# Altium PCB NIXIEClock_151223.PcbDoc (part 1 of 3)
Units mil, origin at the board's own origin, x right, y up, seen from the top; angles counter-clockwise.
Board outline 8470 x 2600 mil, 2 copper layers (Top Layer, Bottom Layer); 115 components, 157 nets, 483 pads, 249 vias.
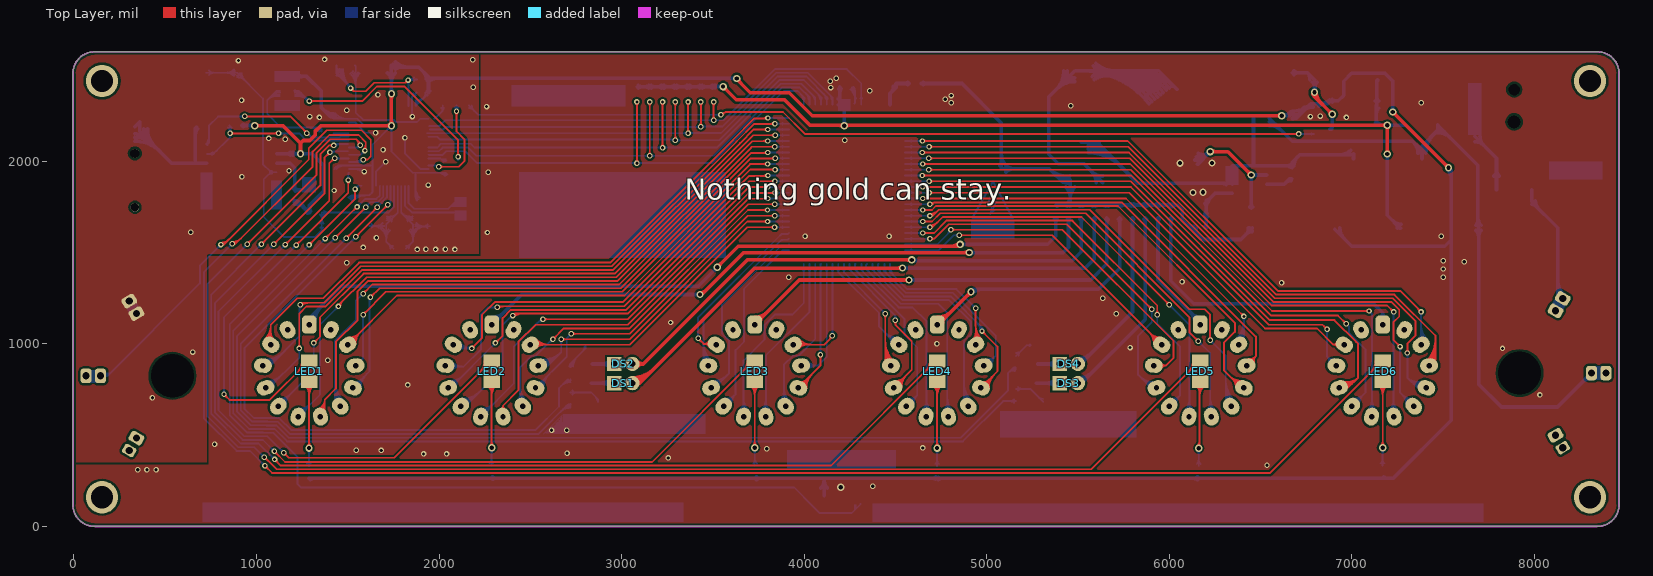
[diagram p0: Top Layer view]
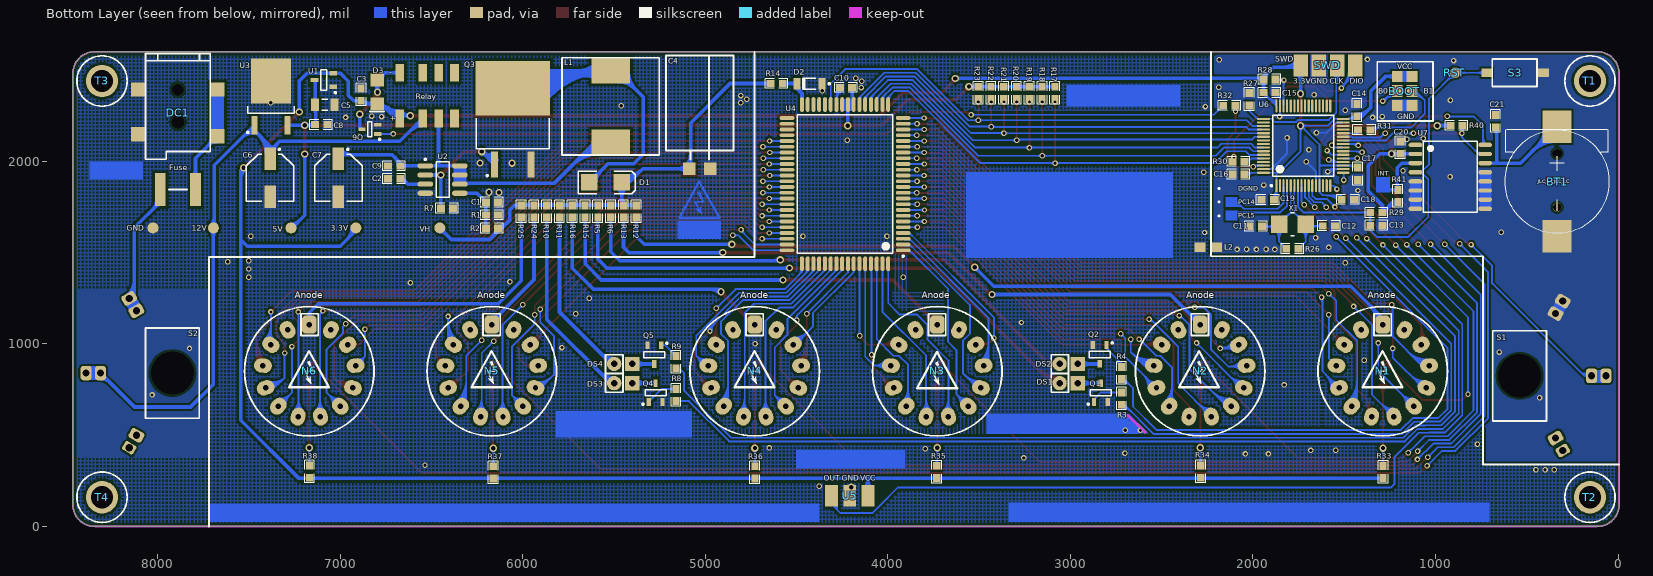
[diagram p1: Bottom Layer view, seen from below]

## Layer stack, top to bottom
Top Layer: signal copper 1.4
Dielectric: dielectric 12.6, FR-4, Dk 4.8
Bottom Layer: signal copper 1.4

## Board outline
8464,120 8464,2480 ccw(c8344,2480) 8344,2600 114,2600 ccw(c114,2480) -6,2480 -6,120 ccw(c114,120) 114,0 8344,0 ccw(c8344,120)

## Design rules (kind name [scope] priority, off if disabled: settings)
Clearance [All] p1: gap=7
HoleSize [All] p1: absolutevalues=TRUE maxlimit=500 minlimit=1 maxpercent=80.000 minpercent=20.000
MinimumSolderMaskSliver [All] p1: minsoldermaskwidth=0
PlaneConnect [All] p1: planeconnectstyle=Direct reliefexpansion=20 reliefentries=4 reliefconductorwidth=15 reliefairgap=10
PolygonConnect [All] p1: connectstyle=Direct reliefconductorwidth=15 reliefentries=4 polygonreliefangle="90 Angle" airgapwidth=10
RoutingVias [All] p1: holewidth=28 width=50 viastyle="Through Hole" minholewidth=10 minwidth=20 maxholewidth=28 maxwidth=50
SilkToSilkClearance [All] p1: silktosilkclearance=0
SilkToSolderMaskClearance [IsPad] p1: minsilkscreentomaskgap=0 clearancetoexposedcopper=TRUE
SolderMaskExpansion [All] p1: expansion=4
Width [All] p1: maxlimit=20 minlimit=1 preferedwidth=10
23 further rules are at their usual default settings.

## Components (designator, comment, footprint, x,y, rotation, side; value= is the part's Value field where it differs from the comment)
3.3V "TEST" TEST#1 6914,1630 r90 bottom (schematic designator 3.3v)
5V "TEST" TEST#2 7269,1630 r180 bottom
12V "TEST" TEST#3 7694,1635 r90 bottom
BOOT "Header 3X2" HDR2X3 1219,2485 r270 bottom
BT1 "CR1220 holder" BAT1220 334,1890 r0 bottom
C1 "Cap Semi" C0603 6168,1777 r180 bottom
C2 "Cap Semi" C0603 6704,1905 r180 bottom
C3 "Cap Semi" C0603 6884,2365 r270 bottom
C4 "Cap Pol1" 电容卧放2.54mm-1 5080,1959 r90 bottom
C5 "Cap Pol1" C1206 7084,2310 r180 bottom
C6 "Cap Pol1" HONOR_63X77 7384,1910 r270 bottom
C7 "Cap Pol1" HONOR_63X77 7009,1910 r270 bottom
C8 "Cap Semi" C0603 7104,2200 r0 bottom
C9 "Cap Semi" C0603 6704,1975 r180 bottom
C10 "Cap" C0603 4229,2405 r180 bottom
C11 "20pF" C0603 1984,1645 r180 bottom
C12 "20pF" C0603 1584,1645 r0 bottom
C13 "Cap Semi" c0603 1324,1650 r180 bottom
C14 "Cap Semi" C0603 1429,2280 r270 bottom
C15 "Cap Semi" C0603 1909,2375 r0 bottom
C16 "Cap Semi" C0603 2079,1930 r180 bottom
C17 "Cap Semi" C0603 1427,1932 r90 bottom
C18 "Cap Semi" C0603 1480,1790 r0 bottom
C19 "Cap Semi" C0603 1919,1790 r180 bottom
C20 "Cap Semi" C0603 1194,2075 r90 bottom
C21 "Cap Semi" C0603 670,2220 r270 bottom
D1 "RS1G" SMB 5546,1884 r180 bottom
D2 "ZM75" LL-34 4429,2425 r0 bottom
D3 "1N4007" 1N4007W 6797,2445 r270 bottom
DC1 "Power" DC-5mm贴片 7889,2590 r270 bottom
DS1 "Lamp Neon" PIN2 2959,785 r0 top
DS2 "Lamp Neon" PIN2 2959,890 r0 top
DS3 "Lamp Neon" PIN2 5399,785 r0 top
DS4 "Lamp Neon" PIN2 5399,890 r0 top
Fuse "Fuse 1" SMD2018P100TF 7889,1845 r0 bottom (schematic designator F1)
GND "TEST" TEST#3 8025,1635 r90 bottom
L1 "Inductor Iron" GDRH127 5518,2301 r90 bottom
L2 "L0" 0805 2200,1529 r0 bottom
LED1 "LED" AVX_B_3528-21 1289,850 r90 top
LED2 "LED" AVX_B_3528-21 2289,850 r90 top
LED3 "LED" AVX_B_3528-21 3729,850 r90 top
LED4 "LED" AVX_B_3528-21 4729,850 r90 top
LED5 "LED" AVX_B_3528-21 6169,850 r90 top
LED6 "LED" AVX_B_3528-21 7169,850 r90 top
N1 "ИН-14" IN14 1289,850 r0 bottom
N2 "ИН-14" IN14 2289,850 r0 bottom
N3 "ИН-14" IN14 3729,850 r0 bottom
N4 "ИН-14" IN14 4729,850 r0 bottom
N5 "ИН-14" IN14 6169,850 r0 bottom
N6 "ИН-14" IN14 7169,850 r0 bottom
Q1 "A42" SOT-23-3L 2833,733 r90 bottom
Q2 "A42" SOT-23-3L 2839.89,942 r270 bottom
Q3 "IRF840" TO-263-2L 6054,2231 r90 bottom
Q4 "A42" SOT-23-3L 5272,733 r90 bottom
Q5 "A42" SOT-23-3L 5278.89,941 r270 bottom
Q6 "S9013" SOT-323 6837,2175 r0 bottom
R1 "Res Semi" R0603 6168,1707 r180 bottom
R2 "Res Semi" R0603 6168,1632 r0 bottom
R3 "Res Semi" R0603 2719,700 r270 bottom
R4 "Res Semi" R0603 2719,840 r270 bottom
R5 "Res Semi" R0603 5589,1725 r90 bottom
R6 "Res Semi" R0603 5519,1725 r90 bottom
R7 "Res Semi" R0603 6415,1744 r180 bottom
R8 "Res Semi" R0603 5159,720 r270 bottom
R9 "Res Semi" R0603 5159,900 r270 bottom
R10 "Res Semi" R0603 5869,1725 r90 bottom
R11 "Res Semi" R0603 5799,1725 r90 bottom
R12 "Res Semi" R0603 5379,1725 r90 bottom
R13 "Res Semi" R0603 5449,1725 r90 bottom
R14 "Res Semi" R0603 4609,2425 r0 bottom
R15 "Res Semi" R0603 5659,1725 r90 bottom
R16 "Res Semi" R0603 5729,1725 r90 bottom
R17 "Res Semi" R0603 3084,2375 r270 bottom
R18 "Res Semi" R0603 3154,2375 r270 bottom
R19 "Res Semi" R0603 3224,2375 r270 bottom
R20 "Res Semi" R0603 3294,2375 r270 bottom
R21 "Res Semi" R0603 3364,2375 r270 bottom
R22 "Res Semi" R0603 3434,2375 r270 bottom
R23 "Res Semi" R0603 3504,2375 r270 bottom
R24 "Res Semi" R0603 5939,1725 r90 bottom
R25 "Res Semi" R0603 6009,1725 r90 bottom
R26 "Res Semi" R0603 1784,1520 r0 bottom
R27 "Res Semi" R0603 2019,2340 r270 bottom
R28 "Res Semi" R0603 1909,2450 r180 bottom
R29 "Res Semi" R0603 1324,1720 r180 bottom
R30 "Res Semi" R0603 2079,2000 r180 bottom
R31 "Res Semi" R0603 1390,2173 r180 bottom
R32 "Res Semi" R0603 2129,2305 r0 bottom
R33 "Res Semi" R0603 1288,298 r90 bottom
R34 "Res Semi" R0603 2287,300 r90 bottom
R35 "Res Semi" R0603 3733,299 r90 bottom
R36 "Res Semi" R0603 4729,296 r90 bottom
R37 "Res Semi" R0603 6162,296 r90 bottom
R38 "Res Semi" R0603 7169,300 r90 bottom
R40 "Res Semi" R0603 885,2195 r0 bottom
R41 "Res Semi" R0603 1205,1810 r270 bottom
Relay "HFD4" HFD4 6673,2235 r180 bottom
RST "TEST" TEST#3 894,2485 r0 bottom
S1 "钮子开关" 钮子开关6mm#1 539,825 r0 bottom
S2 "钮子开关" 钮子开关6mm#2 7919,840 r180 bottom
S3 "SW-PB" 贴片按键（红头） 689,2410 r180 bottom
SWD "Header 4" HDR1X4 1439,2525 r0 bottom
T1 "铜柱" 螺丝孔-3mm 154,2440 r180 bottom
T2 "铜柱" 螺丝孔-3mm 154,160 r180 bottom
T3 "铜柱" 螺丝孔-3mm 8304,2440 r180 bottom
T4 "铜柱" 螺丝孔-3mm 8304,160 r180 bottom
U1 "XC6206" SOT-23-3L 7089,2445 r0 bottom
U2 "MC34063A" SOIC8 6439,1900 r180 bottom
U3 "L78M05" TO-252-2L 7379,2355 r90 bottom
U4 "HV57708" HV57708PG 4234,1875 r0 bottom
U5 "Infrared receiver" SIP3 4309,168 r180 bottom
U6 "STM32F103RBT6" LQFP64_N 1724,2085 r90 bottom
U7 "DS3231" SOP16_75MM 919,1915 r180 bottom
VH "TEST" TEST#4 6454,1620 r180 bottom
X1 "8MHZ" SMD2_50X32 1784,1655 r90 bottom

## Footprints (in the part's own frame and the unit in brackets; to place one, negate y for a bottom-side part, rotate by r counter-clockwise, add the part's x,y. Pads: shape width x height; smd on the part's side, far side on the other; paste and mask are expansions set on the pad)
1N4007W [mil]
  rect 70x75 smd: 1(0,0) 2(130,0)
  silkscreen extent 173,-41 173,39
0805 [mil] "1/8W"
  rect 60x50 smd: 1(0,0) 2(90,0)
AVX_B_3528-21 [mm]
  rect 1.8x2.3 smd: 1(-1.45,0) 2(1.45,0)
BAT1220 [mm]
  round 1.2 hole 1.3 unplated: 0(0,-3.886)
  round 1.2 hole 1.2 unplated: 0(0,3.607)
  rect 4x4.5 smd: 1(0,-7.595) 2(0,7.645)
  silkscreen extent -7.22,-7.19 7.22,7.24
C0603 [mm] "Chip Resistor; Body 1.6 x 0.8 mm (LxW typ)"
  rect 1.1x1 smd: 1(-0.85,-0.025) 2(0.85,-0.025)
  silkscreen extent -1.57,-0.71 1.57,0.66
c0603 [mm] "Chip Resistor; Body 1.6 x 0.8 mm (LxW typ)"
  rect 1.1x1 smd: 1(-0.85,-0.025) 2(0.85,-0.025)
  silkscreen extent -1.57,-0.71 1.57,0.66
C1206 [mm] "Chip Capacitor, Body 3.2x1.6mm, IPC High Density"
  rect 1.1x1.7 smd: 1(-1.35,0) 2(1.35,0)
  silkscreen extent -0.4,-0.75 0.4,0.75, body extent -1.7,-0.9 1.7,0.9, height 1.3
DC-5mm贴片 [mm]
  round 0 hole 1.6 unplated: 0(5,0)
  round 0 hole 1.8 unplated: 0(9.5,0)
  rect 2x2 smd: 1(5,5.5) 1(11.5,5.5) 2(5,-5.5) 3(11.2,-5.5)
  silkscreen extent 0,-4.5 14.7,4.5
GDRH127 [mm]
  rect 3.5x5.4 smd: 1(-4.95,0) 2(4.95,0)
  silkscreen extent -6.75,-6.75 6.75,6.75
HDR1X4 [mil] "Connector; Header; 4 Position"
  rect 80x120 smd: 1(0,0) 2(100,0) 3(200,0) 4(300,0)
HDR2X3 [mil] "Connector; Header; 3x2 Position"
  rect 59.06x59.06 smd: 1(20,10) 2(20,90) 5(180,10) 6(180,90)
  rect 65x59.06 smd: 3(100,10) 4(100,90)
HFD4 [mm]
  rect 1.2x2.5 smd: 1(0,0) 2(3.2,0) 3(5.4,0) 4(7.6,0) 5(7.6,6.35) 6(5.4,6.35) 7(3.2,6.35) 8(0,6.35)
HONOR_63X77 [mm]
  rect 3.15x1.6 smd: 1(-2.65,0) 2(2.65,0)
  silkscreen extent -4.07,-3.3 3.3,3.3
HV57708PG [mm] "QFP, 80-Leads, Body 17.40x23.40mm, Pitch 0.80mm, IPC Medium Density"
  oval 2.05x0.55 smd: 1(-8.075,9.2) 2(-8.075,8.4) 3(-8.075,7.6) 4(-8.075,6.8) 5(-8.075,6) 6(-8.075,5.2) 7(-8.075,4.4) 8(-8.075,3.6) 9(-8.075,2.8) 10(-8.075,2) 11(-8.075,1.2) 12(-8.075,0.4) 13(-8.075,-0.4) 14(-8.075,-1.2) 15(-8.075,-2) 16(-8.075,-2.8) 17(-8.075,-3.6) 18(-8.075,-4.4) 19(-8.075,-5.2) 20(-8.075,-6) 21(-8.075,-6.8) 22(-8.075,-7.6) 23(-8.075,-8.4) 24(-8.075,-9.2) 41(8.075,-9.2) 42(8.075,-8.4) 43(8.075,-7.6) 44(8.075,-6.8) 45(8.075,-6) 46(8.075,-5.2) 47(8.075,-4.4) 48(8.075,-3.6) 49(8.075,-2.8) 50(8.075,-2) 51(8.075,-1.2) 52(8.075,-0.4) 53(8.075,0.4) 54(8.075,1.2) 55(8.075,2) 56(8.075,2.8) 57(8.075,3.6) 58(8.075,4.4) 59(8.075,5.2) 60(8.075,6) 61(8.075,6.8) 62(8.075,7.6) 63(8.075,8.4) 64(8.075,9.2)
  oval 0.55x2.05 smd: 25(-6,-11.075) 26(-5.2,-11.075) 27(-4.4,-11.075) 28(-3.6,-11.075) 29(-2.8,-11.075) 30(-2,-11.075) 31(-1.2,-11.075) 32(-0.4,-11.075) 33(0.4,-11.075) 34(1.2,-11.075) 35(2,-11.075) 36(2.8,-11.075) 37(3.6,-11.075) 38(4.4,-11.075) 39(5.2,-11.075) 40(6,-11.075) 65(6,11.075) 66(5.2,11.075) 67(4.4,11.075) 68(3.6,11.075) 69(2.8,11.075) 70(2,11.075) 71(1.2,11.075) 72(0.4,11.075) 73(-0.4,11.075) 74(-1.2,11.075) 75(-2,11.075) 76(-2.8,11.075) 77(-3.6,11.075) 78(-4.4,11.075) 79(-5.2,11.075) 80(-6,11.075)
  silkscreen extent -8.2,-9.65 6.65,10.15
IN14 [mm]
  rrect50% 2x2.5 hole 0.762: 1(0,-6.5)
  oval 2x2.5 hole 0.762 rot 152.31: 2(-3.021,-5.755)
  oval 2x2.5 hole 0.762 rot 124.62: 3(-5.349,-3.692)
  oval 2x2.5 hole 0.762 rot 96.92: 4(-6.453,-0.784)
  oval 2x2.5 hole 0.762 rot 69.23: 5(-6.078,2.305)
  oval 2x2.5 hole 0.762 rot 41.54: 6(-4.31,4.865)
  oval 2x2.5 hole 0.762 rot 13.85: 7(-1.556,6.311)
  oval 2x2.5 hole 0.762 rot 166.15: 8(1.555,6.311)
  oval 2x2.5 hole 0.762 rot 138.46: 9(4.31,4.866)
  oval 2x2.5 hole 0.762 rot 110.77: 10(6.077,2.305)
  oval 2x2.5 hole 0.762 rot 83.08: 11(6.453,-0.784)
  oval 2x2.5 hole 0.762 rot 55.38: 12(5.349,-3.692)
  oval 2x2.5 hole 0.762 rot 27.69: 13(3.021,-5.755)
  silkscreen extent -9,-9 9,9
LL-34 [mm]
  rect 0.95x1.65 smd: 1(-1.75,0) 2(1.75,0)
  silkscreen extent -2.87,-0.12 -2.62,0.12
LQFP64_N [mm] "Thin QFP, 64-Leads, Body 10x10mm, Pitch 0.5mm, IPC Medium Density"
  oval 1.8x0.3 smd: 1(-5.55,3.75) 2(-5.55,3.25) 3(-5.55,2.75) 4(-5.55,2.25) 5(-5.55,1.75) 6(-5.55,1.25) 7(-5.55,0.75) 8(-5.55,0.25) 9(-5.55,-0.25) 10(-5.55,-0.75) 11(-5.55,-1.25) 12(-5.55,-1.75) 13(-5.55,-2.25) 14(-5.55,-2.75) 15(-5.55,-3.25) 16(-5.55,-3.75) 33(5.55,-3.75) 34(5.55,-3.25) 35(5.55,-2.75) 36(5.55,-2.25) 37(5.55,-1.75) 38(5.55,-1.25) 39(5.55,-0.75) 40(5.55,-0.25) 41(5.55,0.25) 42(5.55,0.75) 43(5.55,1.25) 44(5.55,1.75) 45(5.55,2.25) 46(5.55,2.75) 47(5.55,3.25) 48(5.55,3.75)
  oval 0.3x1.8 smd: 17(-3.75,-5.55) 18(-3.25,-5.55) 19(-2.75,-5.55) 20(-2.25,-5.55) 21(-1.75,-5.55) 22(-1.25,-5.55) 23(-0.75,-5.55) 24(-0.25,-5.55) 25(0.25,-5.55) 26(0.75,-5.55) 27(1.25,-5.55) 28(1.75,-5.55) 29(2.25,-5.55) 30(2.75,-5.55) 31(3.25,-5.55) 32(3.75,-5.55) 49(3.75,5.55) 50(3.25,5.55) 51(2.75,5.55) 52(2.25,5.55) 53(1.75,5.55) 54(1.25,5.55) 55(0.75,5.55) 56(0.25,5.55) 57(-0.25,5.55) 58(-0.75,5.55) 59(-1.25,5.55) 60(-1.75,5.55) 61(-2.25,5.55) 62(-2.75,5.55) 63(-3.25,5.55) 64(-3.75,5.55)
  silkscreen extent -5.67,-4.25 4.25,4.58, body extent -5,-5 5,5, height 1.6
PIN2 [mm] "Photosensitive Diode; 2 Leads"
  rect 2x2 hole 0.9: 1(0,0)
  round 2 hole 0.9: 2(2.54,0)
R0603 [mm] "Chip Resistor; Body 1.6 x 0.8 mm (LxW typ)"
  rect 1.1x1 smd: 1(-0.85,-0.025) 2(0.85,-0.025)
  silkscreen extent -1.57,-0.71 1.57,0.66
SIP3 [mil]
  rect 70x120 smd: 1(0,0) 2(100,0) 3(200,0)
SMB [mm] "DO-214-AA/SMB; 2 C-Bend Leads; Body 5.3 x 3.6 mm, inc. leads (LxW)"
  rect 2.3x2.3 smd: 1(-2.25,0) 2(2.25,0)
  silkscreen extent -3.8,-1.55 4.1,1.55
SMD2_50X32 [mm]
  rect 2.4x2.286 smd: 1(0,1.85) 2(0,-1.85)
  silkscreen extent -1.6,-0.25 1.6,0.25
SMD2018P100TF [mm]
  rect 1.5x4.6 smd: 1(-2.45,0) 2(2.45,0)
SOIC8 [mm]
  oval 2.2x0.7 smd: 1(-2.4,1.905) 2(-2.4,0.635) 3(-2.4,-0.635) 4(-2.4,-1.905) 5(2.4,-1.905) 6(2.4,-0.635) 7(2.4,0.635) 8(2.4,1.905)
  silkscreen extent -2.53,-2.45 0.9,2.93
SOP16_75MM [mm]
  oval 1.9x0.6 smd: 1(-4.85,4.445) 2(-4.85,3.175) 3(-4.85,1.905) 4(-4.85,0.635) 5(-4.85,-0.635) 6(-4.85,-1.905) 7(-4.85,-3.175) 8(-4.85,-4.445) 9(4.85,-4.445) 10(4.85,-3.175) 11(4.85,-1.905) 12(4.85,-0.635) 13(4.85,0.635) 14(4.85,1.905) 15(4.85,3.175) 16(4.85,4.445)
  silkscreen extent -3.75,-4.95 3.75,4.95
SOT-23-3L [mm]
  rect 1.1x0.6 smd: 1(-1.3,0.95) 2(-1.3,-0.95) 3(1.3,0)
  silkscreen extent -1.72,-1.45 0.43,1.88
SOT-323 [mm]
  rect 1x0.5 smd: 1(-1.1,0.65) 2(-1.1,-0.65) 3(1.1,0)
  silkscreen extent -1.47,-1.05 0.28,1.52
TEST#1 [mil]
  round 60 smd: 1(5,0)
TEST#2 [mil]
  round 60 smd: 1(0,5)
TEST#3 [mil]
  round 60 smd: 1(0,0)
TEST#4 [mil]
  round 60 smd: 1(0,15)
TO-252-2L [mm]
  rect 2.55x0.8 smd: 1(-4,2.3) 2(-4,-2.3)
  rect 6.25x5.55 smd: 3(2.15,0)
  silkscreen extent -5.12,-3.25 -1.35,3.33
TO-263-2L [mm]
  rect 3.6x1 smd: 1(-6.3,2.54) 3(-6.3,-2.54)
  rect 7.6x10.4 smd: 2(4.3,0)
  silkscreen extent -7.97,-5.1 0.15,5.1
电容卧放2.54mm-1 [mil] "11.6mmX5.3mm"
  rect 70x70 smd: 1(0,8) 2(0,-108)
  silkscreen extent 50,-235 621,135
螺丝孔-3mm [mm]
  round 4.5 hole 3.1: 1(0,0)
贴片按键（红头） [mm]
  rect 1.5x1.2 smd: 1(-0.762,1.905) 2(7.112,1.905)
  silkscreen extent 0,0 6.22,3.81
钮子开关6mm#1 [mm]
  rrect50% 1.8x1.4 hole 1 rot 30: 1(-6,10.392)
  rrect50% 2x1.524 hole 1 rot 30: 1(-5,8.66)
  rrect50% 1.524x2 hole 1: 2(-12,0) 2(-10,0)
  rrect50% 2x1.524 hole 1 rot 150: 3(-6,-10.392) 3(-5,-8.66)
  round 0 hole 6 unplated: 4(0,0)
  silkscreen extent -3.75,-6.27 3.75,6.27
钮子开关6mm#2 [mm]
  rrect50% 2x1.524 hole 1 rot 30: 1(-6,10.392) 1(-5,8.66)
  rrect50% 1.524x2 hole 1: 2(-12,0) 2(-10,0)
  rrect50% 1.8x1.4 hole 1 rot 150: 3(-6,-10.392)
  rrect50% 2x1.524 hole 1 rot 150: 3(-5,-8.66)
  round 0 hole 6 unplated: 4(0,0)
  silkscreen extent -3.75,-6.27 3.75,6.27

## Part data
BOOT: "Header, 3-Pin, Dual row"
BT1: library part BATTERY
C1 C2 C3 C8 C9 C13 C14 C15 C16 C17 C18 C19 C20 C21: "Capacitor (Semiconductor SIM Model)"
C4 C5 C6 C7: "Polarized Capacitor (Radial)"
C10: "Capacitor"
C11 C12: library part 普通电容, "Capacitor"
D1: library part "D Schottky", "Schottky Diode"
D2: library part "Diode 11DQ03", "Schottky Rectifier"
D3: library part "Diode 1N4007", "1 Amp General Purpose Rectifier"
DC1: library part 电源插座5.4mm
DS1 DS2 DS3 DS4: "Neon Lamp"
Fuse: "Fuse"
L1: "Magnetic-Core Inductor"
LED1 LED2 LED3 LED4 LED5 LED6: "LED发光管"
Q1 Q2 Q4 Q5 Q6: library part NPN, "NPN Bipolar Transistor"
Q3: library part NMOS-2, "N-Channel Power MOSFET"
R1 R2 R3 R4 R5 R6 R7 R8 R9 R10 R11 R12 R13 R14 R15 R16 R17 R18 R19 R20 R21 R22 R23 R24 R25 R26 R27 R28 R29 R30 R31 R32 R33 R34 R35 R36 R37 R38 R40 R41: "Semiconductor Resistor"
Relay: library part Relay
S3: "Switch"
SWD: "Header, 4-Pin"
U5: library part "Infrared Receiver"
U6: "STM32 ARM-based 32-bit MCU Performance Line with 128 kB Flash, 20 kB Internal RAM, -40 to +85癈 Temperature, 64-Pin LQFP, Tray"
X1: library part XTAL, "Crystal Oscillator"

## Via types
v1: diameter 30, hole 18, Top Layer to Bottom Layer, tented both sides, 204 vias
v2: diameter 40, hole 23, Top Layer to Bottom Layer, tented both sides, 35 vias
v3: diameter 30, hole 15, Top Layer to Bottom Layer, tented both sides, 10 vias

## Nets (pads, with @x,y where several pads share a name; then routed paths per layer and width w, separated by ;. In a path a pad name is that pad's centre, name@x,y a point inside that pad or via, vN(x,y) a via of type N, cw(c..) or ccw(c..) an arc to the next point about the centre after c; other vN are vias at no path point)
\I\N\T\/SQW: R41.1 U7.3 | length 378.2
  Bottom Layer w20: U7.3@1109.94,1990 1185,1990 1210,1965 1210,1847.46 R41.1@1206,1843.46 1268.46,1843.46 1280,1855 ; R41.1@1199.15,1852.28 ccw(c1172.96,1878.47) 1210,1878.47 ; R41.1@1212.85,1836.62 cw(c1229.38,1820.08) 1229.38,1843.46 cw(c1229.38,1866.85) R41.1@1212.85,1850.31
BOOST_ONOFF: R32.1 U6.62 | length 697.4
  Top Layer w10: v1(1999,1970) 2109,1970 2139,2000 2139,2120 2095.54,2163.46 v1(2095.54,2273.77) ; v1@2006.07,1962.93 cw(c2023.14,1945.86) 2023.14,1970 cw(c2023.14,1994.14) v1@2006.07,1977.07 ; v1@2088.46,2266.7 cw(c2071.39,2249.63) 2095.54,2249.63 cw(c2119.68,2249.63) v1@2102.61,2266.7
  Bottom Layer w10: U6.62@1942.5,1976.73 1992.27,1976.73 v1(1999,1970) ; R32.1@2085.9,2294.92 cw(c2067.51,2273.77) v1(2095.54,2273.77) ; v1@2088.46,2280.84 ccw(c2071.39,2297.91) 2095.54,2297.91 ccw(c2119.68,2297.91) v1@2102.61,2280.84 ; R32.1@2095.54,2306 v1(2095.54,2273.77) ; R32.1@2105.17,2294.92 ccw(c2123.56,2273.77) v1(2095.54,2273.77)
BOOT0: R30.2 U6.60 | length 147.1
  Bottom Layer w10: U6.60@1942.5,2016.1 2007.9,2016.1 ; 2017.38,2006.62 ccw(c2031.71,2020.94) R30.2@2041.34,2003.12 ; R30.2@2025.54,1999 2025,1999 2007.9,2016.1 ; R30.2@2036.58,2011.92 cw(c2025.05,2033.25) 2007.9,2016.1
BOOT1: R31.1 U6.28 | length 82.9
  Bottom Layer w10: R31.1@1422.57,2153.9 U6.28@1505.5,2153.9
DGND: BOOT.5 BOOT.6 BT1.2 C11.1 C12.1 C13.2 C14.1 C15.1 C16.1 C17.1 C18.1 C19.1 C20.2 C21.1 L2.1 R27.1 S1.3 S3.2 SWD.3 U6.12 U6.18 U6.31 U6.47 U6.63 U7.5 U7.6 U7.7 U7.8 U7.9 U7.10 U7.11 U7.12 U7.13 | length 1115.1
  Bottom Layer w10: U6.18@1505.5,1957.05 1576.95,1957.05 ; U6.31@1505.5,2212.95 1540.05,2212.95 1541.83,2211.17 ; U6.18@1534.36,1957.05 cw(c1534.36,1888.36) v1@1582.93,1936.93 ; U6.31@1535.02,2212.05 cw(c1535.02,2196.25) 1546.19,2207.42 ; 1558.5,1957.05 cw(c1558.5,1912.5) v1(1590,1944) ; v1@1644.93,2148.93 ccw(c1627.86,2131.86) 1627.86,2156 ccw(c1627.86,2180.14) v1@1644.93,2163.07 ; v1(1652,2156) 1597,2156 1552.93,2200.07 1552.93,2200.68 1542.44,2211.17 ; U6.12@1655.1,1866.5 1655.1,1945.1 v1(1708,1998) ; v1@1698,1998 cw(c1673.86,1998) 1690.93,1980.93 cw(c1708,1963.86) v1@1708,1988 ; v1@1805.93,2121.93 cw(c1788.86,2104.86) 1813,2104.86 cw(c1837.14,2104.86) v1@1820.07,2121.93 ; v1(1813,2129) 1813,2044.41 1900.36,1957.05 U6.63@1942.5,1957.05 ; v1@1846.93,2252.07 ccw(c1834.8,2264.2) 1851.95,2264.2 ; U6.47@1851.95,2274.08 ccw(c1883.08,2274.08) v1@1861.07,2252.07 ; v1(1854,2245) 1851.95,2247.05 U6.47@1851.95,2303.5 1851.95,2352.42 ; C15.1@1859.04,2373.85 cw(c1834.19,2370.18) 1851.95,2352.42 ; C15.1@1873.52,2361.32 ccw(c1873.43,2330.94) 1851.95,2352.42 ; C15.1@1875.54,2376 1851.95,2352.42 ; 1541.83,2211.17 ccw(c1537.97,2207.32) 1535.44,2212.15 cw(c1538.3,2207.03) 1542.44,2211.17 ; 1541.83,2211.17 1542.44,2211.17 ; U6.31@1535.66,2213.59 ccw(c1541.51,2219.43) 1541.51,2211.17 cw(c1541.51,2219.43) U6.31@1535.66,2213.59
  other v1: 430,705 650,955 1880,1517 1981,1517 2087,1517 1928,1518 2035,1518 1584,1528 1657,1582 640,1611 1425,1840 1940,1870 920,1915 1178,1948 1693,2063 1157,2121 1067,2125 1345,2240 1292,2245 1495,2280 918,2334 1665,2365 2188,2406 901,2552 2184,2557 1373,2558
DOT1: R3.2 U6.9 | length 3734.4
  Top Layer w10: v1(1491,1579) v1(1661,1749) ; v1@1491,1589 ccw(c1491,1613.14) 1508.07,1596.07 ccw(c1525.14,1579) v1@1501,1579 ; v1@1651,1749 cw(c1626.86,1749) 1643.93,1731.93 cw(c1661,1714.86) v1@1661,1739
  Bottom Layer w10: 1473.22,1560.22 ccw(c1454.44,1579) v1@1481,1579 ; 1475.64,1562.64 cw(c1491,1547.27) v1@1491,1569 ; v1(1491,1579) 1492,1579 914,1001 914,637 977,574 1061.71,574 1062.15,573.55 1116.3,573.55 1183.85,506 2543,506 2703.54,666.54 R3.2@2720,666.54 ; v1(1661,1749) 1714.16,1802.16 U6.9@1714.16,1866.5 ; 2663.46,626.46 cw(c2720,569.93) R3.2@2720,649.88 ; 2680.53,643.53 cw(c2720,604.07) R3.2@2720,659.88 ; 2697.61,660.61 cw(c2720,638.21) R3.2@2720,669.88
DOT2: R4.2 U6.8 | length 3793.9
  Top Layer w10: v1(1544,1586) v1(1719.5,1761.5) ; v1@1544,1596 ccw(c1544,1620.14) 1561.07,1603.07 ccw(c1578.14,1586) v1@1554,1586 ; v1@1709.5,1761.5 cw(c1685.36,1761.5) 1702.43,1744.43 cw(c1719.5,1727.36) v1@1719.5,1751.5
  Bottom Layer w10: v1@1534,1586 cw(c1509.86,1586) 1526.93,1568.93 cw(c1544,1551.86) v1@1544,1576 ; v1(1544,1586) 934,976 934,645.55 985.55,594 1069.99,594 1070.44,593.55 1124.58,593.55 1189.14,529 2529,529 2657,657 2657,758 2699,800 ; v1(1719.5,1761.5) 1733.84,1775.84 U6.8@1733.84,1866.5 ; 2666.88,767.88 cw(c2720,714.76) R4.2@2720,789.88 ; 2683.95,784.95 cw(c2720,748.9) R4.2@2720,799.88 ; R4.2@2705.37,805.84 cw(c2699,806.39) 2699,800 ; R4.2@2708.51,795.42 ccw(c2699,787.84) 2699,800 ; R4.2@2720,806.54 2713.46,800 2699,800
DOT3: R8.2 U6.11 | length 6264.9
  Top Layer w10: v1(1377,1577) v1@1550.5,1750.5 ; v1@1377,1587 ccw(c1377,1611.14) 1394.07,1594.07 ccw(c1411.14,1577) v1@1387,1577 ; 1532.22,1732.22 cw(c1551,1713.44) v1@1551,1740 ; 1534.64,1734.64 ccw(c1519.27,1750) v1@1541,1750
  Bottom Layer w10: v1@1367,1577 cw(c1342.86,1577) 1359.93,1559.93 cw(c1377,1542.86) v1@1377,1567 ; v1(1377,1577) 873,1073 873,620 959,534 1045.14,534 1045.58,533.55 1099.73,533.55 1167.28,466 4869,466 5089.54,686.54 R8.2@5160,686.54 ; v1(1551,1750) 1595,1794 1657,1794 1675,1812 1675,1866.28 U6.11@1674.79,1866.5 ; v1@1551,1760 ccw(c1551,1784.14) 1568.07,1767.07 ccw(c1585.14,1750) v1@1561,1750 ; R8.2@5149.62,676.15 ccw(c5124.55,651.08) 5124.55,686.54 ccw(c5124.55,721.99) R8.2@5149.62,696.92
DOT4: R9.2 U6.10 | length 6382.4
  Top Layer w10: v1(1431,1581) v1(1599,1749) ; v1@1431,1591 ccw(c1431,1615.14) 1448.07,1598.07 ccw(c1465.14,1581) v1@1441,1581 ; v1@1589,1749 cw(c1564.86,1749) 1581.93,1731.93 cw(c1599,1714.86) v1@1599,1739
  Bottom Layer w10: v1@1421,1581 cw(c1396.86,1581) 1413.93,1563.93 cw(c1431,1546.86) v1@1431,1571 ; v1(1431,1581) 894,1044 894,628 968,554 1053.42,554 1053.87,553.55 1108.02,553.55 1175.57,486 4858,486 5117,745 5117,842 ; v1(1599,1749) 1599,1751 1624,1776 1663.96,1776 1694.47,1806.51 U6.10@1694.47,1866.5 ; v1@1599,1759 ccw(c1599,1778.31) 1612.66,1764.66 ; v1@1609,1749 cw(c1637.97,1749) 1617.49,1769.49 ; 5128.25,853.25 cw(c5148.84,832.67) R9.2@5158.45,860.14 ; 5139.51,864.51 cw(c5154.67,849.34) R9.2@5161.76,869.58 ; R9.2@5155.15,850.71 ccw(c5143,816) 5117,842 ; R9.2@5160,866.54 5141.54,866.54 5117,842
DS3221_SCL: U6.27 U7.16 | length 1163.6
  Top Layer w10: v1(935,2246) 1184,2246 1285,2145 1288,2145 ; v1@942.07,2238.93 cw(c959.14,2221.86) 959.14,2246 cw(c959.14,2270.14) v1@942.07,2253.07 ; v1@1266,2154 ccw(c1241.86,2154) 1258.93,2171.07 ccw(c1276,2188.14) v1@1276,2164
  Bottom Layer w10: U7.16@723.24,2094.82 ccw(c685.19,2132.87) 739,2132.87 ; U7.16@728.06,2090 739,2100.94 739,2195 789,2245 v1@935,2245 ; U7.16@730.31,2087.75 ccw(c709.33,2108.72) 739,2108.72 ; 908.44,2245 ccw(c908.44,2272.56) v1@927.93,2253.07 ; 913.27,2245 cw(c913.27,2224.27) v1@927.93,2238.93 ; v1@1276,2144 cw(c1276,2112.62) 1298.19,2134.81 ; v1@1286,2154 ccw(c1302.9,2154) 1290.95,2142.05 ; 1288,2145 1302,2131 1455,2131 1459,2135 1504.71,2135 U6.27@1505.5,2134.21
  other v1: 1276,2154
DS3221_SDA: R40.1 U6.26 U7.15 | length 1267.7
  Top Layer w10: v1(855,2153) v1(1121,2153) ; v1@862.07,2145.93 cw(c879.14,2128.86) 879.14,2153 cw(c879.14,2177.14) v1@862.07,2160.07 ; v1@1113.93,2145.93 ccw(c1096.86,2128.86) 1096.86,2153 ccw(c1096.86,2177.14) v1@1113.93,2160.07
  Bottom Layer w10: U7.15@728.06,2040 U7.15@764,2040 ; U7.15@751.68,2036.81 ccw(c751.68,2058.86) 767.27,2043.27 ; U7.15@751.68,2046.81 ccw(c751.68,2093) 784.34,2060.34 ; U7.15@757.44,2036.38 cw(c764,2032.26) U7.15@764,2040 ; U7.15@757.44,2043.62 ccw(c764,2047.74) U7.15@764,2040 ; R40.1@843.12,2185.62 cw(c814.44,2156.94) v1@855,2156.94 ; v1@846.92,2158.9 ccw(c831.11,2170.44) 850.02,2175.51 ; v1@847.93,2160.07 ccw(c830.86,2177.14) 855,2177.14 ccw(c879.14,2177.14) v1@862.07,2160.07 ; v1@848.42,2145.47 cw(c835.8,2131) 855,2131 ; v1@850,2161.66 ccw(c842.86,2174.03) 856.65,2170.33 ; 850.37,2174.21 ccw(c870.33,2179.56) v1@860,2161.66 ; R40.1@851.54,2196 855,2192.54 v1(855,2153) 855,2131 ; v1@855,2164.16 cw(c885.35,2164.16) R40.1@863.89,2185.62 ; 857.77,2174.5 ccw(c871.63,2170.78) v1@861.83,2160.3 ; v1@861.58,2145.47 ccw(c874.2,2131) 855,2131 ; v1(1121,2153) 1233,2153 1272,2114 1504.97,2114 U6.26@1505.5,2114.53 ; v1@1128.07,2145.93 cw(c1145.14,2128.86) 1145.14,2153 cw(c1145.14,2177.14) v1@1128.07,2160.07 ; U7.15@764,2040 855,2131
GND: C1.2 C2.1 C3.1 C4.2 C5.2 C6.2 C7.2 C8.1 C9.1 C10.1 D2.1 DC1.2 DC1.3 GND.1 L2.2 Q1.2 Q2.2 Q3.3 Q4.2 Q5.2 Q6.2 R1.2 R7.2 U1.1 U2.4 U3.3 U4.34 U5.2 | length 1665.9
  Bottom Layer w3.94: 5009,1779 5029,1834 5040,1828 5011,1778 ; 5023,1714 5027,1738 ; 5025,1718 5038,1731 ; 5026,1721 5027,1725 ; 5026,1726 5029,1734 ; 5030,1726 5057,1778 ; 5032,1816 5037,1827 ; 5050,1777 5029,1726 5055,1778 ; 5020,1709 5048,1737 5031,1730 5026,1748 5020,1709
  Bottom Layer w5: 2573.7,507 2678.31,611.61
  Bottom Layer w7.87: 5033,1829 5009,1778 5055,1778
  Bottom Layer w10: C10.1@4254.05,2393.62 cw(c4193.81,2333.38) U4.34@4279,2333.38 ; C10.1@4261.12,2400.69 cw(c4217.95,2357.52) 4279,2357.52 ; C10.1@4262.46,2404 4279,2387.46 4279,2320.12 U4.34@4275.57,2316.69 ; C10.1@4268.19,2407.76 cw(c4242.1,2381.66) 4279,2381.66 ; 4279,2360.04 ccw(c4300.73,2360.04) U4.34@4285.36,2344.67
  Bottom Layer w11.81: 4922,1690 5142,1690 5033,1889 4922,1690
  other v1: 4375,220 350,310 400,310 450,310 6535,335 3255,375 1915,397 2041,397 2701,401 1683,416 1546,417 3795,425 4650,430 770,450 2616,527 2700,527 8030,720 1829,775 1390,910 7825,975 5785,980 4727.17,1000 3268,1117 5710,1165 5635,1250 6615,1335 6070,1340 3915,1365 7500,1365 7500,1410 1495,1445 7615,1449 7500,1455 4005,1590 4465,1590 7490,1590 2265,1610 2270,1940 4222,2115 6970,2240 6773,2245 6826,2248 2260,2300 5460,2305 7380,2320 4806,2321 4773,2340 4806,2360 4359,2386 4145,2404 4142,2439 4175,2455
  other v2: 4200,215 6130,1829 6185,1830 6059,1990 6234,1991
HV_CLK: R22.2 U4.30 U6.52 | length 2742.6
  Top Layer w10: v1@3426.93,2197.07 ccw(c3409.86,2214.14) 3434,2214.14 ccw(c3458.14,2214.14) v1@3441.07,2197.07 ; v1@3426.93,2317.93 cw(c3409.86,2300.86) 3434,2300.86 cw(c3458.14,2300.86) v1@3441.07,2317.93 ; v1(3434,2190) v1(3434,2325)
  Bottom Layer w10: U6.52@1948.5,2175 2024,2175 2037.54,2188.54 3432.54,2188.54 v1(3434,2190) 3552.28,2190 3847.28,2485 4019,2485 4155.26,2348.74 U4.30@4155.26,2311.02 ; 3406.32,2188.54 ccw(c3406.32,2217.68) v1@3426.93,2197.07 ; 3413.39,2188.54 cw(c3413.39,2169.39) v1@3426.93,2182.93 ; v1@3441.07,2182.93 cw(c3458.14,2165.86) 3458.14,2190 cw(c3458.14,2214.14) v1@3441.07,2197.07 ; 4139.52,2364.48 cw(c4115.6,2340.55) U4.30@4149.43,2340.55
HV_DIN1: R17.2 U4.25 U6.59 | length 2838.8
  Top Layer w10: v1@3076.93,1997.07 ccw(c3059.86,2014.14) 3084,2014.14 ccw(c3108.14,2014.14) v1@3091.07,1997.07 ; v1@3076.93,2317.93 cw(c3059.86,2300.86) 3084,2300.86 cw(c3108.14,2300.86) v1@3091.07,2317.93 ; v1(3084,1990) v1(3084,2325)
  Bottom Layer w10: U6.59@1942.5,2035.79 1943.22,2035.07 2019.07,2035.07 2039,2055 2144,2055 2209,1990 v1(3084,1990) 3493.71,1990 3888.71,2385 3964,2385 3997.78,2351.22 U4.25@3997.78,2311.02 ; v1@3076.93,1982.93 ccw(c3059.86,1965.86) 3059.86,1990 ccw(c3059.86,2014.14) v1@3076.93,1997.07 ; v1@3091.07,1982.93 cw(c3108.14,1965.86) 3108.14,1990 cw(c3108.14,2014.14) v1@3091.07,1997.07 ; 3980.29,2368.71 cw(c3952.13,2340.55) U4.25@3991.95,2340.55 ; 3997.36,2351.64 cw(c3986.27,2340.55) U4.25@4001.95,2340.55
HV_DIN2: R18.2 U4.26 U6.58 | length 2805.6
  Top Layer w10: v1@3146.93,2037.07 ccw(c3129.86,2054.14) 3154,2054.14 ccw(c3178.14,2054.14) v1@3161.07,2037.07 ; v1@3146.93,2317.93 cw(c3129.86,2300.86) 3154,2300.86 cw(c3178.14,2300.86) v1@3161.07,2317.93 ; v1(3154,2030) v1(3154,2325)
  Bottom Layer w10: U6.58@1942.5,2055.47 1999.47,2055.47 2019,2075 2159,2075 2204,2030 v1(3154,2030) 3505.42,2030 3880.42,2405 3974,2405 4029.28,2349.72 U4.26@4029.28,2311.02 ; v1@3146.93,2022.93 ccw(c3129.86,2005.86) 3129.86,2030 ccw(c3129.86,2054.14) v1@3146.93,2037.07 ; v1@3161.07,2022.93 cw(c3178.14,2005.86) 3178.14,2030 cw(c3178.14,2054.14) v1@3161.07,2037.07 ; 4012.84,2366.16 cw(c3987.24,2340.55) U4.26@4023.45,2340.55
HV_DIN3: R19.2 U4.27 U6.57 | length 2776.9
  Top Layer w10: v1@3216.93,2082.07 ccw(c3199.86,2099.14) 3224,2099.14 ccw(c3248.14,2099.14) v1@3231.07,2082.07 ; v1@3216.93,2317.93 cw(c3199.86,2300.86) 3224,2300.86 cw(c3248.14,2300.86) v1@3231.07,2317.93 ; v1(3224,2075) v1(3224,2325)
  Bottom Layer w10: U6.57@1942.5,2075.16 1989.16,2075.16 2010,2096 2173,2096 2194,2075 v1(3224,2075) 3522.14,2075 3872.14,2425 3984,2425 4060.77,2348.23 U4.27@4060.77,2311.02 ; v1@3216.93,2067.93 ccw(c3199.86,2050.86) 3199.86,2075 ccw(c3199.86,2099.14) v1@3216.93,2082.07 ; v1@3231.07,2067.93 cw(c3248.14,2050.86) 3248.14,2075 cw(c3248.14,2099.14) v1@3231.07,2082.07 ; 4045.4,2363.6 cw(c4022.34,2340.55) U4.27@4054.94,2340.55
HV_DIN4: R20.2 U4.28 U6.54 | length 2790.1
  Top Layer w10: v1@3286.93,2122.07 ccw(c3269.86,2139.14) 3294,2139.14 ccw(c3318.14,2139.14) v1@3301.07,2122.07 ; v1@3286.93,2317.93 cw(c3269.86,2300.86) 3294,2300.86 cw(c3318.14,2300.86) v1@3301.07,2317.93 ; v1(3294,2115) v1(3294,2325)
  Bottom Layer w10: U6.54@1942.72,2134 1990,2134 2004,2120 3289,2120 v1(3294,2115) 3533.85,2115 3863.85,2445 3999,2445 4092.27,2351.73 ; 3257.79,2120 cw(c3257.79,2078.79) v1@3286.93,2107.93 ; v1@3301.07,2107.93 cw(c3318.14,2090.86) 3318.14,2115 cw(c3318.14,2139.14) v1@3301.07,2122.07 ; 4074.41,2369.59 cw(c4045.38,2340.55) U4.28@4086.44,2340.55 ; U4.28@4088.93,2345.33 ccw(c4084.45,2351.73) 4092.27,2351.73 ; 4091.49,2352.51 cw(c4079.52,2340.55) U4.28@4096.44,2340.55 ; U4.28@4092.27,2311.02 4092.27,2351.73 ; U4.28@4095.61,2345.33 cw(c4100.08,2351.73) 4092.27,2351.73
HV_LE: R21.2 U4.29 U6.53 | length 2789.1
  Top Layer w10: v1@3356.93,2161.11 ccw(c3339.86,2178.18) 3364,2178.18 ccw(c3388.14,2178.18) v1@3371.07,2161.11 ; v1@3356.93,2317.93 cw(c3339.86,2300.86) 3364,2300.86 cw(c3388.14,2300.86) v1@3371.07,2317.93 ; v1(3364,2154.04) v1(3364,2325)
  Bottom Layer w10: U6.53@1934.5,2154 3356,2154 v1(3364,2154.04) ; 3339.76,2154 ccw(c3339.76,2178.29) v1@3356.93,2161.11 ; 3339.96,2154 cw(c3339.96,2130) v1@3356.93,2146.97 ; v1@3364.96,2155 3545.57,2155 3855.57,2465 4010.72,2465 4123.76,2351.95 ; v1@3371.07,2146.97 cw(c3390.45,2127.59) 3390.45,2155 ; v1@3371.07,2161.11 ccw(c3385.83,2175.87) 3385.83,2155 ; 4105.76,2369.96 cw(c4076.35,2340.55) U4.29@4117.94,2340.55 ; U4.29@4120.35,2345.27 ccw(c4115.52,2351.95) 4123.76,2351.95 ; 4122.83,2352.89 cw(c4110.49,2340.55) U4.29@4127.94,2340.55 ; U4.29@4123.76,2311.02 4123.76,2351.95 ; U4.29@4127.18,2345.27 cw(c4132,2351.95) 4123.76,2351.95
HV_POL: R23.2 U4.35 U6.51 | length 2918.7
  Top Layer w10: v1@3496.93,2232.07 ccw(c3479.86,2249.14) 3504,2249.14 ccw(c3528.14,2249.14) v1@3511.07,2232.07 ; v1@3496.93,2317.93 cw(c3479.86,2300.86) 3504,2300.86 cw(c3528.14,2300.86) v1@3511.07,2317.93 ; v1(3504,2225) v1(3504,2325)
  Bottom Layer w10: U6.51@1945.14,2192.36 1945.78,2193 2002,2193 2034,2225 v1(3504,2225) 3559,2225 3839,2505 4234,2505 4312.74,2426.26 U4.35@4312.74,2311.02 ; v1@3496.93,2217.93 ccw(c3479.86,2200.86) 3479.86,2225 ccw(c3479.86,2249.14) v1@3496.93,2232.07 ; v1@3511.07,2217.93 cw(c3528.14,2200.86) 3528.14,2225 cw(c3528.14,2249.14) v1@3511.07,2232.07 ; U4.35@4308.62,2344.67 ccw(c4298.67,2354.62) 4312.74,2354.62 ccw(c4326.81,2354.62) U4.35@4316.86,2344.67
INFRARED_DATA: U5.1 U6.16 | length 5504.7
  Top Layer w10: v1(1288,1542) 1540,1794 v1(1540,1848) ; v1@1288,1552 ccw(c1288,1576.14) 1305.07,1559.07 ccw(c1322.14,1542) v1@1298,1542 ; v1@1532.93,1840.93 cw(c1515.86,1823.86) 1540,1823.86 cw(c1564.14,1823.86) v1@1547.07,1840.93
  Bottom Layer w10: v1@1278,1542 cw(c1253.86,1542) 1270.93,1524.93 cw(c1288,1507.86) v1@1288,1532 ; v1(1288,1542) 853,1107 853,610 949,514 1036.85,514 1037.3,513.55 1091.45,513.55 1225,380 1225,231 1242,214 3944,214 4048,110 ; v1(1540,1848) 1558.5,1866.5 U6.16@1576.36,1866.5 ; v1@1540,1858 ccw(c1540,1882.14) 1557.07,1865.07 ccw(c1574.14,1848) v1@1550,1848 ; 4048,109.96 4084.96,73 4259,73 U5.1@4309,123
LED1: LED1.2 U6.17 | length 2561.3
  Top Layer w10: v1@822,714 cw(c822,692.27) 837.36,707.64 ; v1@822,723 852,693 1072,693 1268.59,889.59 1251.09,907.09 LED1.2@1289,907.09 ; v1@832,724 ccw(c858.56,724) 839.78,705.22 ; v1(1217,1541) 1503,1827 v1(1503,1897) ; v1@1217,1551 ccw(c1217,1575.14) 1234.07,1558.07 ccw(c1251.14,1541) v1@1227,1541 ; 1222.31,843.31 ccw(c1158.52,907.09) LED1.2@1248.72,907.09 ; 1239.03,860.03 cw(c1279.16,819.91) LED1.2@1279.16,876.65 ; 1239.38,860.38 ccw(c1192.67,907.09) LED1.2@1258.72,907.09 ; LED1.2@1256.1,877.1 cw(c1279.16,854.05) LED1.2@1279.16,886.65 ; LED1.2@1256.45,877.45 ccw(c1226.81,907.09) LED1.2@1268.72,907.09 ; v1@1495.93,1889.93 cw(c1478.86,1872.86) 1503,1872.86 cw(c1527.14,1872.86) v1@1510.07,1889.93
  Bottom Layer w10: v1@814.93,731.07 ccw(c797.86,748.14) 822,748.14 ccw(c846.14,748.14) v1@829.07,731.07 ; v1(822,724) 822,1146 v1(1217,1541) ; v1@1207,1541 cw(c1182.86,1541) 1199.93,1523.93 cw(c1217,1506.86) v1@1217,1531 ; v1@1495.93,1904.07 ccw(c1478.86,1921.14) 1503,1921.14 ccw(c1527.14,1921.14) v1@1510.07,1904.07 ; v1(1503,1897) 1503,1934.87 U6.17@1505.5,1937.36 ; 1503,1929.15 cw(c1513.71,1929.15) U6.17@1506.14,1936.72
LED2: LED2.2 U6.21 | length 4001.1
  Top Layer w10: v1@1149,394 cw(c1149,369.86) 1166.07,386.93 cw(c1183.14,404) v1@1159,404 ; v1(1149,404) 1177,376 1755,376 2286.09,907.09 LED2.2@2289,907.09 ; v1(1158,1544) 1398,1784 1398,1989 1427,2018 v1(1428,2017) ; v1@1158,1554 ccw(c1158,1578.14) 1175.07,1561.07 ccw(c1192.14,1544) v1@1168,1544 ; 1407.51,1998.51 cw(c1428,1978.03) v1@1428,2007 ; 1412.34,2003.34 ccw(c1398.69,2017) v1@1418,2017 ; 2222.31,843.31 ccw(c2158.52,907.09) LED2.2@2248.72,907.09 ; 2239.03,860.03 cw(c2279.16,819.91) LED2.2@2279.16,876.65 ; 2239.38,860.38 ccw(c2192.67,907.09) LED2.2@2258.72,907.09 ; LED2.2@2256.1,877.1 cw(c2279.16,854.05) LED2.2@2279.16,886.65 ; LED2.2@2256.45,877.45 ccw(c2226.81,907.09) LED2.2@2268.72,907.09
  Bottom Layer w10: v1@1139,404 ccw(c1114.86,404) 1131.93,421.07 ccw(c1149,438.14) v1@1149,414 ; v1@1148,1544 cw(c1123.86,1544) 1140.93,1526.93 cw(c1158,1509.86) v1@1158,1534 ; v1(1149,404) 1059.45,493.55 1029.02,493.55 1028.57,494 934,494 792,636 792,1178 v1(1158,1544) ; v1@1428.9,2016.1 U6.21@1505.5,2016.1 ; v1@1435.07,2009.93 cw(c1449.98,1995.02) 1449.98,2016.1 ; v1@1435.07,2024.07 ccw(c1454.31,2043.31) 1454.31,2016.1
LED3: LED3.2 U6.23 | length 5524.5
  Top Layer w10: v1(1095,1546) 1372,1823 1372,2019 v1(1402,2049) ; v1@1095,1556 ccw(c1095,1580.14) 1112.07,1563.07 ccw(c1129.14,1546) v1@1105,1546 ; v1@1098,401 cw(c1098,376.86) 1115.07,393.93 cw(c1132.14,411) v1@1108,411 ; v1@1100.91,408.09 1156,353 3167,353 3721.09,907.09 LED3.2@3729,907.09 ; v1@1392,2049 cw(c1367.86,2049) 1384.93,2031.93 cw(c1402,2014.86) v1@1402,2039 ; 3665.84,851.84 ccw(c3610.6,907.09) LED3.2@3688.72,907.09 ; 3670.5,856.5 cw(c3719.16,807.84) LED3.2@3719.16,876.65 ; 3682.91,868.91 ccw(c3644.74,907.09) LED3.2@3698.72,907.09 ; LED3.2@3687.57,873.57 cw(c3719.16,841.98) LED3.2@3719.16,886.65
  Bottom Layer w10: v1@1085,1546 cw(c1060.86,1546) 1077.93,1528.93 cw(c1095,1511.86) v1@1095,1536 ; v1@1088,411 ccw(c1063.86,411) 1080.93,428.07 ccw(c1098,445.14) v1@1098,421 ; v1(1095,1546) 772,1223 772,626 924,474 1020.28,474 1020.73,473.55 1035.45,473.55 v1(1098,411) ; v1@1396,2043 1408,2055 U6.23@1502.41,2055 ; v1(1402,2049) cw(c1416.49,2034.51) 1416.49,2055 ; v1@1409.07,2041.93 cw(c1440.63,2010.37) 1440.63,2055
LED4: LED4.2 U6.25 | length 6619.6
  Top Layer w10: v1(1027,1545) 1350,1868 1350,2039.43 1398.57,2088 ; v1@1027,1555 ccw(c1027,1579.14) 1044.07,1562.07 ccw(c1061.14,1545) v1@1037,1545 ; v1@1099,357 cw(c1099,332.86) 1116.07,349.93 cw(c1133.14,367) v1@1109,367 ; v1(1099,367) 1133,333 4147,333 4721.09,907.09 LED4.2@4729,907.09 ; 1401.27,2088 ccw(c1401.27,2108.73) v1@1415.93,2094.07 ; v1@1415.51,2080.37 ccw(c1398.57,2065.38) 1398.57,2088 ; v1@1423,2088 1398.57,2088 ; 4665.84,851.84 ccw(c4610.6,907.09) LED4.2@4688.72,907.09 ; 4670.5,856.5 cw(c4719.16,807.84) LED4.2@4719.16,876.65 ; 4682.91,868.91 ccw(c4644.74,907.09) LED4.2@4698.72,907.09 ; LED4.2@4687.57,873.57 cw(c4719.16,841.98) LED4.2@4719.16,886.65
  Bottom Layer w10: v1@1017,1545 cw(c992.86,1545) 1009.93,1527.93 cw(c1027,1510.86) v1@1027,1535 ; v1(1027,1545) 752,1270 752,617 915,454 1012,454 v1(1099,367) ; v1@1089,367 ccw(c1064.86,367) 1081.93,384.07 ccw(c1099,401.14) v1@1099,377 ; v1@1430.07,2079.93 cw(c1466.46,2043.54) 1466.46,2095 ; 1442.31,2095 ccw(c1442.31,2067.69) v1(1423,2087) 1431,2095 U6.25@1501.78,2095
LED5: LED5.2 U6.24 | length 8282.8
  Top Layer w10: v1(949,1546) 1329,1926 1329,2046.71 1403.29,2121 1546,2121 ; v1@949,1556 ccw(c949,1580.14) 966.07,1563.07 ccw(c983.14,1546) v1@959,1546 ; v1@1042,369 cw(c1042,340.03) 1062.49,360.51 ; v1@1044,379 1110,313 5572,313 6166.09,907.09 LED5.2@6169,907.09 ; v1@1052,379 ccw(c1071.31,379) 1057.66,365.34 ; v1@1558.03,2088.72 ccw(c1516.71,2091.71) 1546,2121 ; 1561.47,2105.53 cw(c1545.56,2089.62) v1(1568,2088) 1568,2099 1546,2121 ; 6102.31,843.31 ccw(c6038.52,907.09) LED5.2@6128.72,907.09 ; 6119.03,860.03 cw(c6159.16,819.91) LED5.2@6159.16,876.65 ; 6119.38,860.38 ccw(c6072.67,907.09) LED5.2@6138.72,907.09 ; LED5.2@6136.1,877.1 cw(c6159.16,854.05) LED5.2@6159.16,886.65 ; LED5.2@6136.45,877.45 ccw(c6106.81,907.09) LED5.2@6148.72,907.09
  Bottom Layer w10: v1@939,1546 cw(c914.86,1546) 931.93,1528.93 cw(c949,1511.86) v1@949,1536 ; v1(949,1546) 732,1329 732,602 900.45,433.55 987.45,433.55 v1(1042,379) ; v1@1032,379 ccw(c1007.86,379) 1024.93,396.07 ccw(c1042,413.14) v1@1042,389 ; U6.24@1505.5,2075.16 1555.16,2075.16 v1(1568,2088)
LED6: LED6.2 U6.22 | length 9566.6
  Top Layer w10: v1@867,1558 ccw(c867,1625.6) 914.8,1577.8 ; v1@875.49,1542.72 cw(c885,1536.8) 885,1548 ; v1@875.49,1553.28 ccw(c885,1559.2) 885,1548 ; 897.73,1560.73 cw(c867,1591.46) v1(867,1548) 885,1548 ; v1@1046,322 cw(c1046,297.86) 1063.07,314.93 cw(c1080.14,332) v1@1056,332 ; v1(1046,332) 1085,293 6552,293 7159,900 7161.91,900 LED6.2@7169,907.09 ; v1@1586.93,2066.07 ccw(c1560.2,2092.8) 1598,2092.8 ; v1@1595,2061 1598,2064 1598,2105 1559,2144 1398.01,2144 1307,2052.99 1307,1970 885,1548 ; 1598,2073.49 ccw(c1608.49,2073.49) v1@1601.07,2066.07 ; 7102.31,843.31 ccw(c7038.52,907.09) LED6.2@7128.72,907.09 ; 7119.03,860.03 cw(c7159.16,819.91) LED6.2@7159.16,876.65 ; 7119.38,860.38 ccw(c7072.67,907.09) LED6.2@7138.72,907.09 ; LED6.2@7136.1,877.1 cw(c7159.16,854.05) LED6.2@7159.16,886.65 ; LED6.2@7136.45,877.45 ccw(c7106.81,907.09) LED6.2@7148.72,907.09
  Bottom Layer w10: v1@857,1548 cw(c832.86,1548) 849.93,1530.93 cw(c867,1513.86) v1@867,1538 ; v1(867,1548) 712,1393 712,592.35 890.79,413.55 964.45,413.55 v1(1046,332) ; v1@1036,332 ccw(c1011.86,332) 1028.93,349.07 ccw(c1046,366.14) v1@1046,342 ; U6.22@1505.5,2035.79 1570.79,2035.79 v1(1594,2059) ; v1@1584,2059 cw(c1559.86,2059) 1576.93,2041.93 cw(c1594,2024.86) v1@1594,2049
N1_0: N1.12 U4.15 | length 3135.2
  Top Layer w10: N1.12@1499.6,995.37 1769.23,1265 3015.72,1265 3705.72,1955 3839,1955 v1(3840.26,1953.74) ; N1.12@1507.7,1025.33 ccw(c1507.7,1078.11) 1545.02,1040.79 ; N1.12@1507.7,1035.33 ccw(c1507.7,1112.25) 1562.1,1057.86 ; N1.12@1532.07,1000.96 cw(c1596.97,1000.96) 1551.08,1046.85 ; N1.12@1542.07,1000.96 cw(c1631.11,1000.96) 1568.15,1063.92 ; 3813.08,1955 cw(c3813.08,1926.56) v1@3833.19,1946.67 ; 3819.16,1955 ccw(c3819.16,1974.84) v1@3833.19,1960.81
  Bottom Layer w10: v1(3840.26,1953.74) U4.15@3916.09,1953.74 ; v1@3847.33,1946.67 cw(c3864.4,1929.6) 3864.4,1953.74 cw(c3864.4,1977.88) v1@3847.33,1960.81 ; U4.15@3882.44,1949.62 ccw(c3872.49,1939.67) 3872.49,1953.74 ccw(c3872.49,1967.81) U4.15@3882.44,1957.86
N1_1: N1.3 U4.24 | length 3785.7
  Top Layer w10: N1.3@1045.99,1025.27 ccw(c967.76,1103.5) 1078.4,1103.5 ; N1.3@1053.06,1018.2 ccw(c991.91,1079.35) 1078.4,1079.35 ; N1.3@1060.13,1011.13 ccw(c1016.05,1055.21) 1078.4,1055.21 ; N1.3@1078.4,995.37 1078.4,1104.4 1224,1250 1366.72,1250 1561.72,1445 2937.73,1445 3609.15,2116.42 3609.15,2116.57 3727.58,2235 3799,2235 v3(3801.2,2237.2) ; 1078.4,1040.24 ccw(c1109.57,1040.24) N1.3@1087.53,1018.2 ; 1078.4,1064.39 ccw(c1133.72,1064.39) N1.3@1094.6,1025.27 ; 3771.74,2235 ccw(c3771.74,2266.67) v3@3794.13,2244.28 ; 3782.39,2235 cw(c3782.39,2218.39) v3@3794.13,2230.13
  Bottom Layer w10: v3(3801.2,2237.2) U4.24@3916.09,2237.2 ; v3@3808.28,2230.13 cw(c3825.35,2213.06) 3825.35,2237.2 cw(c3825.35,2261.35) v3@3808.28,2244.28 ; U4.24@3882.44,2233.08 ccw(c3872.49,2223.14) 3872.49,2237.2 ccw(c3872.49,2251.27) U4.24@3882.44,2241.32
N1_2: N1.4 U4.23 | length 4141.3
  Top Layer w10: v1@1246.07,1207.93 cw(c1287.28,1166.72) 1287.28,1225 ; 1263.14,1225 ccw(c1263.14,1190.86) v1(1239,1215) 1249,1225 1370.01,1225 1570.01,1425 2946.01,1425 3629.15,2108.14 3629.15,2108.28 3725.86,2205 3839,2205 v1(3839.71,2205.71) ; 3813.86,2205 ccw(c3813.86,2231.56) v1@3832.64,2212.78 ; 3817.28,2205 cw(c3817.28,2183.28) v1@3832.64,2198.64
  Bottom Layer w10: N1.4@1034.96,880.85 1074.85,880.85 1234.63,1040.63 1234.63,1210.63 v1(1239,1215) ; N1.4@1044.73,874.03 ccw(c1044.73,930.29) 1084.51,890.51 ; N1.4@1044.73,884.03 ccw(c1044.73,964.43) 1101.58,907.58 ; N1.4@1044.73,894.03 ccw(c1044.73,998.57) 1118.65,924.65 ; N1.4@1044.73,904.03 ccw(c1044.73,1032.72) 1135.72,941.72 ; N1.4@1044.73,914.03 ccw(c1044.73,1066.86) 1152.8,958.8 ; 1234.63,1180.31 cw(c1273.69,1180.31) v1@1246.07,1207.93 ; v1(3839.71,2205.71) U4.23@3916.09,2205.71 ; v1@3846.78,2198.64 cw(c3863.85,2181.57) 3863.85,2205.71 cw(c3863.85,2229.85) v1@3846.78,2212.78 ; U4.23@3882.44,2201.59 ccw(c3872.49,2191.64) 3872.49,2205.71 ccw(c3872.49,2219.78) U4.23@3882.44,2209.83
N1_3: N1.5 U4.22 | length 4020
  Top Layer w10: v1@1226.93,982.07 ccw(c1209.86,999.14) 1234,999.14 ccw(c1258.14,999.14) v1@1241.07,982.07 ; v1(1234,975) 1234,1165 1274,1205 1378.29,1205 1578.29,1405 2954.29,1405 3649.15,2099.85 3649.15,2100 3724.15,2175 3799,2175 v1(3799.79,2174.21) ; 3773.74,2175 cw(c3773.74,2148.17) v1@3792.72,2167.14 ; 3777.55,2175 ccw(c3777.55,2196.45) v1@3792.72,2181.28
  Bottom Layer w10: N1.5@1049.72,759.26 1068.26,759.26 1234,925 v1(1234,975) ; N1.5@1058.93,777.12 ccw(c1058.93,842.77) 1105.35,796.35 ; N1.5@1058.93,787.12 ccw(c1058.93,876.92) 1122.42,813.42 ; N1.5@1058.93,797.12 ccw(c1058.93,911.06) 1139.49,830.49 ; N1.5@1093.3,762.75 cw(c1145.31,762.75) 1108.53,799.53 ; v1@1226.93,967.93 cw(c1209.86,950.86) 1234,950.86 cw(c1258.14,950.86) v1@1241.07,967.93 ; v1(3799.79,2174.21) U4.22@3916.09,2174.21 ; v1@3806.86,2167.14 cw(c3823.93,2150.07) 3823.93,2174.21 cw(c3823.93,2198.35) v1@3806.86,2181.28 ; U4.22@3882.44,2170.09 ccw(c3872.49,2160.15) 3872.49,2174.21 ccw(c3872.49,2188.28) U4.22@3882.44,2178.33
N1_4: N1.6 U4.21 | length 3960.1
  Top Layer w10: v1(1314,1005) 1347.67,1038.67 1347.67,1146.09 1586.57,1385 2962.58,1385 3669.15,2091.57 3669.15,2091.72 3717.43,2140 3720.15,2142.72 v1(3841.28,2142.72) ; v1@1314,1015 ccw(c1314,1039.14) 1331.07,1022.07 ccw(c1348.14,1005) v1@1324,1005 ; v1@3834.21,2135.65 ccw(c3817.14,2118.57) 3817.14,2142.72 ccw(c3817.14,2166.86) v1@3834.21,2149.79
  Bottom Layer w10: N1.6@1119.3,658.46 1314,853.16 v1(1314,1005) ; N1.6@1125.83,690.19 ccw(c1125.83,751.06) 1168.86,708.02 ; N1.6@1125.83,700.19 ccw(c1125.83,785.2) 1185.93,725.09 ; N1.6@1150.2,665.82 cw(c1207,665.82) 1166.83,705.99 ; N1.6@1160.2,665.82 cw(c1241.14,665.82) 1183.9,723.06 ; v1@1306.93,997.93 cw(c1289.86,980.86) 1314,980.86 cw(c1338.14,980.86) v1@1321.07,997.93 ; v1(3841.28,2142.72) U4.21@3916.09,2142.72 ; v1@3848.35,2135.65 cw(c3865.43,2118.57) 3865.43,2142.72 cw(c3865.43,2166.86) v1@3848.35,2149.79 ; U4.21@3882.44,2138.6 ccw(c3872.49,2128.65) 3872.49,2142.72 ccw(c3872.49,2156.78) U4.21@3882.44,2146.84
N1_5: N1.7 U4.20 | length 3968.6
  Top Layer w10: v1@1446.14,1207.86 1603.29,1365 2970.86,1365 3689.15,2083.28 3689.15,2083.43 3715.72,2110 3799,2110 v1(3800.22,2111.22) ; v1@1459,1205 cw(c1496.93,1205) 1470.11,1231.82 ; 3773.13,2110 ccw(c3773.13,2138.31) v1@3793.15,2118.29 ; 3779.02,2110 cw(c3779.02,2090.02) v1@3793.15,2104.15
  Bottom Layer w10: N1.7@1227.75,601.53 1347.67,721.45 1347.67,1103.67 v1(1449,1205) ; N1.7@1230.11,625.46 ccw(c1230.11,677.54) 1266.93,640.71 ; N1.7@1230.11,635.46 ccw(c1230.11,711.68) 1284,657.78 ; N1.7@1230.11,645.46 ccw(c1230.11,745.82) 1301.07,674.85 ; N1.7@1254.48,611.09 cw(c1295.93,611.09) 1266.62,640.4 ; N1.7@1264.48,611.09 cw(c1330.07,611.09) 1283.69,657.47 ; v1@1439,1205 cw(c1414.86,1205) 1431.93,1187.93 cw(c1449,1170.86) v1@1449,1195 ; v1(3800.22,2111.22) U4.20@3916.09,2111.22 ; v1@3807.29,2104.15 cw(c3824.36,2087.08) 3824.36,2111.22 cw(c3824.36,2135.36) v1@3807.29,2118.29 ; U4.20@3882.44,2107.1 ccw(c3872.49,2097.15) 3872.49,2111.22 ccw(c3872.49,2125.29) U4.20@3882.44,2115.34
N1_6: N1.8 U4.19 | length 3794.2
  Top Layer w10: N1.8@1337.01,643.69 ccw(c1319.92,695) 1374,695 ; N1.8@1340.18,634.21 ccw(c1324.54,681.13) 1374,681.13 ; N1.8@1343.34,624.72 ccw(c1329.17,667.25) 1374,667.25 ; N1.8@1346.5,615.23 ccw(c1333.79,653.38) 1374,653.38 ; N1.8@1350.23,601.53 1374,625.3 1374,695 ; v1@3832.2,2072.65 ccw(c3815.13,2055.58) 3815.13,2079.72 ccw(c3815.13,2103.87) v1@3832.2,2086.8 ; v1(3839.28,2079.72) 3713.72,2079.72 3709.15,2075.15 3709.15,2075 2979.15,1345 1611.57,1345 1554,1287.43 1554,1130.25 1434.59,1010.84 1434.59,755.59 1374,695
  Bottom Layer w10: v1(3839.28,2079.72) U4.19@3916.09,2079.72 ; v1@3846.35,2072.65 cw(c3863.42,2055.58) 3863.42,2079.72 cw(c3863.42,2103.87) v1@3846.35,2086.8 ; U4.19@3882.44,2075.6 ccw(c3872.49,2065.66) 3872.49,2079.72 ccw(c3872.49,2093.79) U4.19@3882.44,2083.84
N1_7: N1.9 U4.18 | length 3966
  Top Layer w10: v1(1584,1275) 1634,1325 2987.43,1325 3707.43,2045 3797.54,2045 v1(3800.77,2048.23) ; v1@1584,1285 ccw(c1584,1309.14) 1601.07,1292.07 ccw(c1618.14,1275) v1@1594,1275 ; 3768.84,2045 ccw(c3768.84,2080.16) v1@3793.7,2055.3 ; 3784.42,2045 cw(c3784.42,2031.88) v1@3793.7,2041.16
  Bottom Layer w10: 1429,708.14 ccw(c1494.49,708.14) N1.9@1448.18,661.83 ; 1429,732.28 ccw(c1518.63,732.28) N1.9@1455.25,668.9 ; 1429,756.42 ccw(c1542.77,756.42) N1.9@1462.32,675.97 ; 1429,780.56 ccw(c1566.91,780.56) N1.9@1469.39,683.04 ; 1429,804.71 ccw(c1591.06,804.71) N1.9@1476.46,690.12 ; N1.9@1458.69,658.44 1429,688.13 1429,1015.86 1544,1130.86 1544,1235 v1(1584,1275) ; v1@1574,1275 cw(c1549.86,1275) 1566.93,1257.93 cw(c1584,1240.86) v1@1584,1265 ; v1(3800.77,2048.23) U4.18@3916.09,2048.23 ; v1@3807.84,2041.16 cw(c3824.91,2024.09) 3824.91,2048.23 cw(c3824.91,2072.37) v1@3807.84,2055.3 ; U4.18@3882.44,2044.11 ccw(c3872.49,2034.16) 3872.49,2048.23 ccw(c3872.49,2062.3) U4.18@3882.44,2052.35
N1_8: N1.10 U4.17 | length 3563.4
  Top Layer w10: v1(1624,1255) 1674,1305 2995.72,1305 3705.72,2015 3786.57,2015 3786.81,2015.24 3811.66,2015.24 3811.9,2015 3839,2015 v1(3840.73,2016.73) ; v1@1624,1265 ccw(c1624,1289.14) 1641.07,1272.07 ccw(c1658.14,1255) v1@1634,1255 ; 3812.41,2015 ccw(c3812.41,2045.06) v1@3833.66,2023.8 ; 3820.77,2015 cw(c3820.77,1996.77) v1@3833.66,2009.66
  Bottom Layer w10: N1.10@1528.27,759.24 1619,849.97 1619,1250 v1(1624,1255) ; N1.10@1537.47,790.12 ccw(c1537.47,842.46) 1574.48,805.45 ; N1.10@1551.84,755.75 cw(c1617.18,755.75) 1570.98,801.95 ; N1.10@1561.84,755.75 cw(c1651.32,755.75) 1588.05,819.02 ; N1.10@1571.84,755.75 cw(c1685.46,755.75) 1605.12,836.09 ; 1619,1218.79 cw(c1660.21,1218.79) v1@1631.07,1247.93 ; v1(3840.73,2016.73) U4.17@3916.09,2016.73 ; v1@3847.8,2009.66 cw(c3864.87,1992.59) 3864.87,2016.73 cw(c3864.87,2040.87) v1@3847.8,2023.8 ; U4.17@3882.44,2012.61 ccw(c3872.49,2002.67) 3872.49,2016.73 ccw(c3872.49,2030.8) U4.17@3882.44,2020.85
N1_9: N1.11 U4.16 | length 3143.8
  Top Layer w10: v1(1584,1160) 1709,1285 3004,1285 3704,1985 3799,1985 v3(3799.24,1985.24) ; v1@1584,1170 ccw(c1584,1194.14) 1601.07,1177.07 ccw(c1618.14,1160) v1@1594,1160 ; 3774.52,1985 ccw(c3774.52,2009.95) v3@3792.17,1992.31 ; 3775.66,1985 cw(c3775.66,1961.66) v3@3792.17,1978.17
  Bottom Layer w10: N1.11@1543.04,880.85 1584,921.81 v1(1584,1160) ; v1@1576.93,1152.93 cw(c1559.86,1135.86) 1584,1135.86 cw(c1608.14,1135.86) v1@1591.07,1152.93 ; v3(3799.24,1985.24) U4.16@3916.09,1985.24 ; v3@3806.31,1978.17 cw(c3823.38,1961.09) 3823.38,1985.24 cw(c3823.38,2009.38) v3@3806.31,1992.31 ; U4.16@3882.44,1981.12 ccw(c3872.49,1971.17) 3872.49,1985.24 ccw(c3872.49,1999.3) U4.16@3882.44,1989.36
N2_0: N2.12 U4.5 | length 2047.2
  Top Layer w10: N2.12@2499.6,995.37 2499.98,995 3044,995 3687.78,1638.78 v1(3837.78,1638.78) ; N2.12@2517.87,1011.13 ccw(c2556.8,1050.06) 2556.8,995 ; N2.12@2524.94,983.73 cw(c2552.14,956.53) 2552.14,995 ; N2.12@2524.94,1018.2 ccw(c2580.94,1074.2) 2580.94,995 ; N2.12@2532.01,976.66 cw(c2576.28,932.39) 2576.28,995 ; N2.12@2532.01,1025.27 ccw(c2605.08,1098.34) 2605.08,995 ; v1@3830.71,1631.71 ccw(c3813.64,1614.64) 3813.64,1638.78 ccw(c3813.64,1662.92) v1@3830.71,1645.85
  Bottom Layer w10: v1(3837.78,1638.78) U4.5@3916.09,1638.78 ; v1@3844.85,1631.71 cw(c3861.92,1614.64) 3861.92,1638.78 cw(c3861.92,1662.92) v1@3844.85,1645.85 ; U4.5@3882.44,1634.66 ccw(c3872.49,1624.71) 3872.49,1638.78 ccw(c3872.49,1652.85) U4.5@3882.44,1642.9